# Altium PCB HanCam.PcbDoc
Units mm, origin at the board's own origin, x right, y up, seen from the top; angles counter-clockwise.
Board outline 152.4 x 101.6 mm, 2 copper layers (Top Layer, Bottom Layer); 116 components, 40 nets, 556 pads, 40 vias.
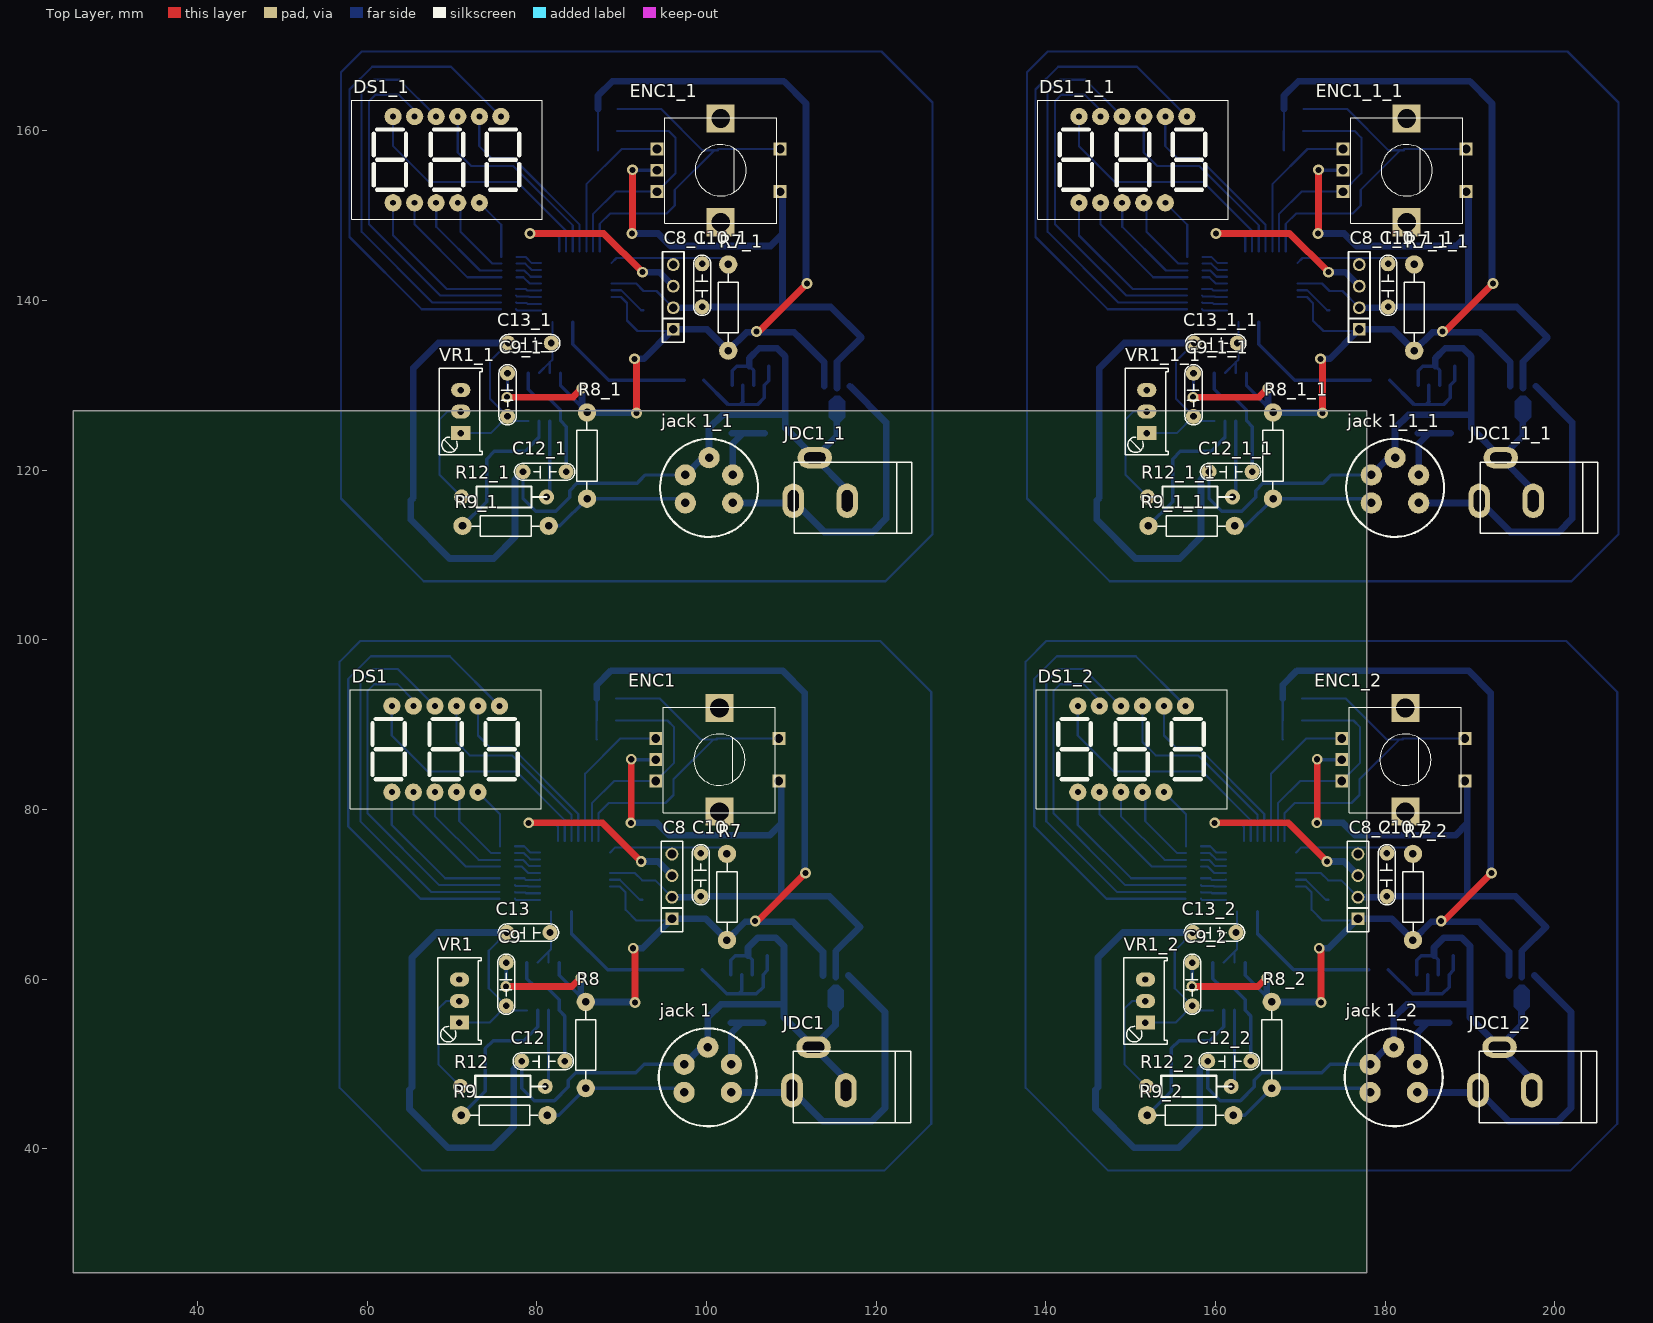
[diagram p0: Top Layer view]
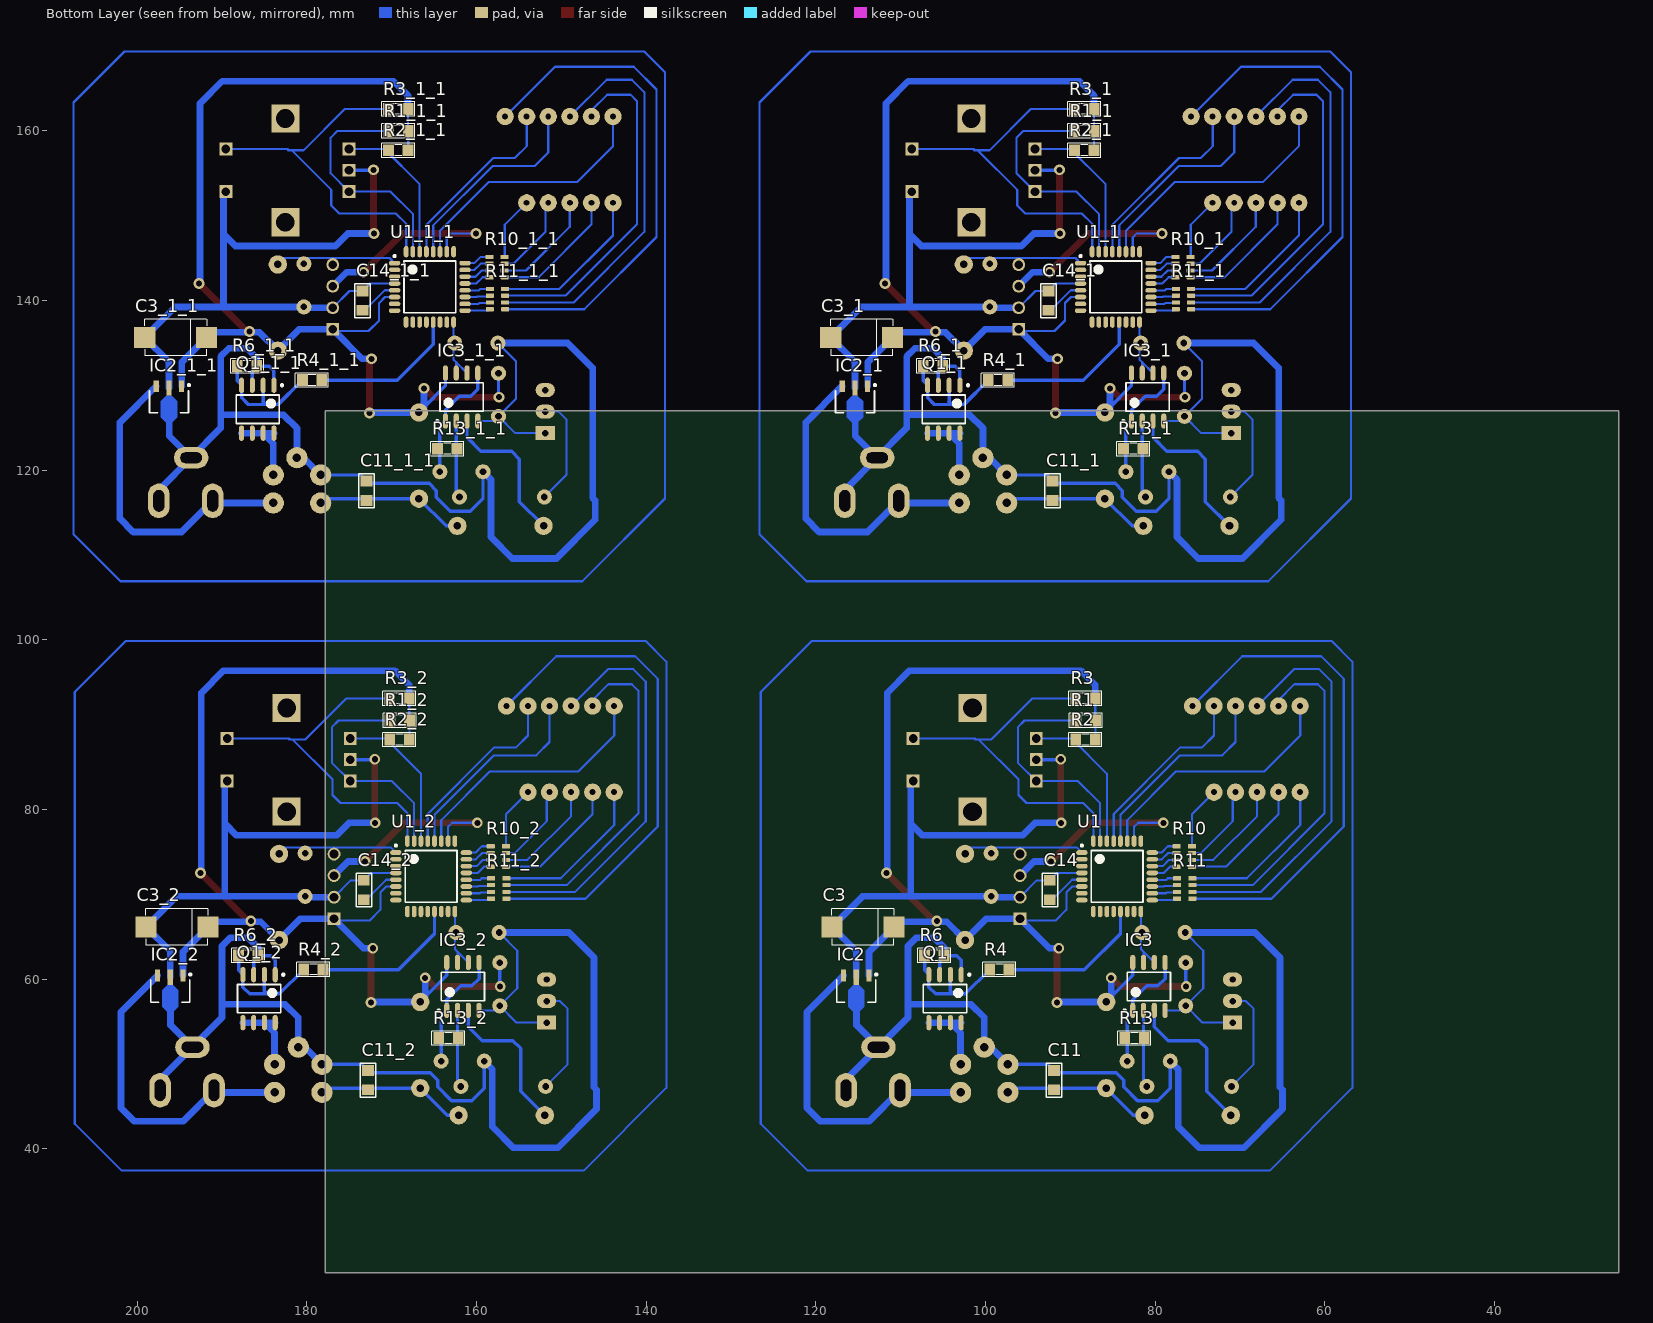
[diagram p1: Bottom Layer view, seen from below]

## Layer stack, top to bottom
Top Solder: solder mask 0.0102, Solder Resist, Dk 3.5
Top Layer: signal copper 0.0356
Dielectric 1: dielectric 0.32, FR-4, Dk 4.8
Bottom Layer: signal copper 0.0356
Bottom Solder: solder mask 0.0102, Solder Resist, Dk 3.5

## Board outline
25.4,25.4 177.8,25.4 177.8,127 25.4,127

## Design rules (kind name [scope] priority, off if disabled: settings)
Clearance [All] p1: gap=0.2 ignorepadtopadclearanceinfootprint=FALSE
PolygonConnect [All] p1: connectstyle=Relief reliefconductorwidth=0.254 reliefentries=4 polygonreliefangle="90 Angle" airgapwidth=0.254
RoutingVias [All] p1: holewidth=0.711 width=1.27 viastyle="Through Hole" minholewidth=0.711 minwidth=1.27 maxholewidth=0.711 maxwidth=1.27
SolderMaskExpansion [All] p1: expansion=0.102
Width [All] p1: maxlimit=0.8 minlimit=0.254 preferedwidth=0.4
30 further rules are at their usual default settings.

## Classes and differential pairs
component class TramHanSTM8: C3 C8 C9 C10 C11 C12 C13 C14 DS1 ENC1 IC2 IC3 "jack 1" JDC1 Q1 R1 R2 R3 R4 R6 R7 R8 R9 R10 R11 R12 R13 U1 VR1

## Components (designator, comment, footprint, x,y, rotation, side; value= is the part's Value field where it differs from the comment)
C3 "CAP" "C 2917" 114.452,66.167 r0 bottom value=*uF
C3_1 "CAP" "C 2917" 114.605,135.636 r0 bottom value=*uF (schematic designator C3)
C3_1_1 "CAP" "C 2917" 195.453,135.636 r0 bottom value=*uF (schematic designator C3)
C3_2 "CAP" "C 2917" 195.301,66.167 r0 bottom value=*uF (schematic designator C3)
C8 "JP4" JP4-C1T 95.936,67.132 r90 top
C8_1 "JP4" JP4-C1T 96.088,136.601 r90 top (schematic designator C8)
C8_1_1 "JP4" JP4-C1T 176.936,136.601 r90 top (schematic designator C8)
C8_2 "JP4" JP4-C1T 176.784,67.132 r90 top (schematic designator C8)
C9 "103" CN2 76.403,59.411 r90 top
C9_1 "103" CN2 76.556,128.88 r90 top (schematic designator C9)
C9_1_1 "103" CN2 157.404,128.88 r90 top (schematic designator C9)
C9_2 "103" CN2 157.251,59.411 r90 top (schematic designator C9)
C10 "103" CN2 99.339,72.314 r90 top
C10_1 "103" CN2 99.492,141.783 r90 top (schematic designator C10)
C10_1_1 "103" CN2 180.34,141.783 r90 top (schematic designator C10)
C10_2 "103" CN2 180.188,72.314 r90 top (schematic designator C10)
C11 "103" SM-0805 91.948,48.108 r270 bottom
C11_1 "103" SM-0805 92.1,117.577 r270 bottom (schematic designator C11)
C11_1_1 "103" SM-0805 172.949,117.577 r270 bottom (schematic designator C11)
C11_2 "103" SM-0805 172.796,48.108 r270 bottom (schematic designator C11)
C12 "103" CN2 80.772,50.343 r180 top
C12_1 "103" CN2 80.924,119.812 r180 top (schematic designator C12)
C12_1_1 "103" CN2 161.773,119.812 r180 top (schematic designator C12)
C12_2 "103" CN2 161.62,50.343 r180 top (schematic designator C12)
C13 "103" CN2 79.019,65.507 r180 top
C13_1 "103" CN2 79.172,134.976 r180 top (schematic designator C13)
C13_1_1 "103" CN2 160.02,134.976 r180 top (schematic designator C13)
C13_2 "103" CN2 159.868,65.507 r180 top (schematic designator C13)
C14 "103" SM-0805 92.431,70.51 r90 bottom
C14_1 "103" SM-0805 92.583,139.979 r90 bottom (schematic designator C14)
C14_1_1 "103" SM-0805 173.431,139.979 r90 bottom (schematic designator C14)
C14_2 "103" SM-0805 173.279,70.51 r90 bottom (schematic designator C14)
DS1 "7SEG" "LED 7 SEG 3 DIGIT" 69.266,87.122 r0 top
DS1_1 "7SEG" "LED 7 SEG 3 DIGIT" 69.418,156.591 r0 top (schematic designator DS1)
DS1_1_1 "7SEG" "LED 7 SEG 3 DIGIT" 150.266,156.591 r0 top (schematic designator DS1)
DS1_2 "7SEG" "LED 7 SEG 3 DIGIT" 150.114,87.122 r0 top (schematic designator DS1)
ENC1 "enc" ENC 101.397,96.033 r270 top
ENC1_1 "enc" ENC 101.549,165.502 r270 top (schematic designator ENC1)
ENC1_1_1 "enc" ENC 182.397,165.502 r270 top (schematic designator ENC1)
ENC1_2 "enc" ENC 182.245,96.033 r270 top (schematic designator ENC1)
IC2 "LM78xx" SOT89-321 115.24,58.623 r270 bottom
IC2_1 "LM78xx" SOT89-321 115.392,128.092 r270 bottom (schematic designator IC2)
IC2_1_1 "LM78xx" SOT89-321 196.24,128.092 r270 bottom (schematic designator IC2)
IC2_2 "LM78xx" SOT89-321 196.088,58.623 r270 bottom (schematic designator IC2)
IC3 "LM358" SO8 80.747,59.151 r90 bottom
IC3_1 "LM358" SO8 80.899,128.62 r90 bottom (schematic designator IC3)
IC3_1_1 "LM358" SO8 161.747,128.62 r90 bottom (schematic designator IC3)
IC3_2 "LM358" SO8 161.595,59.151 r90 bottom (schematic designator IC3)
"jack 1" "907" "jack 907" 103.835,49.708 r180 top
"jack 1_1" "907" "jack 907" 103.988,119.177 r180 top (schematic designator "jack 1")
"jack 1_1_1" "907" "jack 907" 184.836,119.177 r180 top (schematic designator "jack 1")
"jack 1_2" "907" "jack 907" 184.683,49.708 r180 top (schematic designator "jack 1")
JDC1 "Jac DC" DC0 113.259,49.454 r180 top
JDC1_1 "Jac DC" DC0 113.411,118.923 r180 top (schematic designator JDC1)
JDC1_1_1 "Jac DC" DC0 194.259,118.923 r180 top (schematic designator JDC1)
JDC1_2 "Jac DC" DC0 194.107,49.454 r180 top (schematic designator JDC1)
Q1 "IRF7303" SO8 104.775,57.709 r270 bottom
Q1_1 "IRF7303" SO8 104.927,127.178 r270 bottom (schematic designator Q1)
Q1_1_1 "IRF7303" SO8 185.776,127.178 r270 bottom (schematic designator Q1)
Q1_2 "IRF7303" SO8 185.623,57.709 r270 bottom (schematic designator Q1)
R1 "1k" SM-RES-0805 89.332,90.5 r180 bottom value="R1/4W - 1K"
R1_1 "1k" SM-RES-0805 89.484,159.969 r180 bottom value="R1/4W - 1K" (schematic designator R1)
R1_1_1 "1k" SM-RES-0805 170.332,159.969 r180 bottom value="R1/4W - 1K" (schematic designator R1)
R1_2 "1k" SM-RES-0805 170.18,90.5 r180 bottom value="R1/4W - 1K" (schematic designator R1)
R2 "1k" SM-RES-0805 89.357,88.24 r180 bottom value="R1/4W - 1K"
R2_1 "1k" SM-RES-0805 89.51,157.709 r180 bottom value="R1/4W - 1K" (schematic designator R2)
R2_1_1 "1k" SM-RES-0805 170.358,157.709 r180 bottom value="R1/4W - 1K" (schematic designator R2)
R2_2 "1k" SM-RES-0805 170.205,88.24 r180 bottom value="R1/4W - 1K" (schematic designator R2)
R3 "1k" SM-RES-0805 89.357,93.091 r180 bottom value="R1/4W - 1K"
R3_1 "1k" SM-RES-0805 89.51,162.56 r180 bottom value="R1/4W - 1K" (schematic designator R3)
R3_1_1 "1k" SM-RES-0805 170.358,162.56 r180 bottom value="R1/4W - 1K" (schematic designator R3)
R3_2 "1k" SM-RES-0805 170.205,93.091 r180 bottom value="R1/4W - 1K" (schematic designator R3)
R4 "1k" SM-RES-0805 99.517,61.138 r180 bottom value="R1/4W - 1K"
R4_1 "1k" SM-RES-0805 99.67,130.607 r180 bottom value="R1/4W - 1K" (schematic designator R4)
R4_1_1 "1k" SM-RES-0805 180.518,130.607 r180 bottom value="R1/4W - 1K" (schematic designator R4)
R4_2 "1k" SM-RES-0805 180.365,61.138 r180 bottom value="R1/4W - 1K" (schematic designator R4)
R6 "10k" SM-RES-0805 104.902,62.789 r0 bottom value="R1/4W - 1K"
R6_1 "10k" SM-RES-0805 105.054,132.258 r0 bottom value="R1/4W - 1K" (schematic designator R6)
R6_1_1 "10k" SM-RES-0805 185.903,132.258 r0 bottom value="R1/4W - 1K" (schematic designator R6)
R6_2 "10k" SM-RES-0805 185.75,62.789 r0 bottom value="R1/4W - 1K" (schematic designator R6)
R7 "1k" RES-1/4W 102.54,70.079 r90 top value="R1/4W - 1K"
R7_1 "1k" RES-1/4W 102.692,139.548 r90 top value="R1/4W - 1K" (schematic designator R7)
R7_1_1 "1k" RES-1/4W 183.54,139.548 r90 top value="R1/4W - 1K" (schematic designator R7)
R7_2 "1k" RES-1/4W 183.388,70.079 r90 top value="R1/4W - 1K" (schematic designator R7)
R8 "1.5k" RES-1/4W 85.649,51.867 r270 top value="R1/4W - 1K"
R8_1 "1.5k" RES-1/4W 85.801,121.336 r270 top value="R1/4W - 1K" (schematic designator R8)
R8_1_1 "1.5k" RES-1/4W 166.649,121.336 r270 top value="R1/4W - 1K" (schematic designator R8)
R8_2 "1.5k" RES-1/4W 166.497,51.867 r270 top value="R1/4W - 1K" (schematic designator R8)
R9 "10k" RES-1/4W 76.556,43.84 r0 top value="R1/4W - 1K"
R9_1 "10k" RES-1/4W 76.708,113.309 r0 top value="R1/4W - 1K" (schematic designator R9)
R9_1_1 "10k" RES-1/4W 157.556,113.309 r0 top value="R1/4W - 1K" (schematic designator R9)
R9_2 "10k" RES-1/4W 157.404,43.84 r0 top value="R1/4W - 1K" (schematic designator R9)
R10 "RP330" RESCAXS50P160X320X70-8N 76.57,74.466 r180 bottom
R10_1 "RP330" RESCAXS50P160X320X70-8N 76.722,143.935 r180 bottom (schematic designator R10)
R10_1_1 "RP330" RESCAXS50P160X320X70-8N 157.571,143.935 r180 bottom (schematic designator R10)
R10_2 "RP330" RESCAXS50P160X320X70-8N 157.418,74.466 r180 bottom (schematic designator R10)
R11 "RP330" RESCAXS50P160X320X70-8N 76.519,70.694 r180 bottom
R11_1 "RP330" RESCAXS50P160X320X70-8N 76.672,140.163 r180 bottom (schematic designator R11)
R11_1_1 "RP330" RESCAXS50P160X320X70-8N 157.52,140.163 r180 bottom (schematic designator R11)
R11_2 "RP330" RESCAXS50P160X320X70-8N 157.367,70.694 r180 bottom (schematic designator R11)
R12 "1k" "RESISTOR 1/4W" 75.997,47.371 r180 top value="R1/4W - 1K"
R12_1 "1k" "RESISTOR 1/4W" 76.149,116.84 r180 top value="R1/4W - 1K" (schematic designator R12)
R12_1_1 "1k" "RESISTOR 1/4W" 156.997,116.84 r180 top value="R1/4W - 1K" (schematic designator R12)
R12_2 "1k" "RESISTOR 1/4W" 156.845,47.371 r180 top value="R1/4W - 1K" (schematic designator R12)
R13 "10k" SM-RES-0805 83.591,53.061 r180 bottom value="R1/4W - 1K"
R13_1 "10k" SM-RES-0805 83.744,122.53 r180 bottom value="R1/4W - 1K" (schematic designator R13)
R13_1_1 "10k" SM-RES-0805 164.592,122.53 r180 bottom value="R1/4W - 1K" (schematic designator R13)
R13_2 "10k" SM-RES-0805 164.44,53.061 r180 bottom value="R1/4W - 1K" (schematic designator R13)
U1 "STM8S003K3" TQFP32 84.496,72.13 r180 bottom
U1_1 "STM8S003K3" TQFP32 84.648,141.599 r180 bottom (schematic designator U1)
U1_1_1 "STM8S003K3" TQFP32 165.497,141.599 r180 bottom (schematic designator U1)
U1_2 "STM8S003K3" TQFP32 165.344,72.13 r180 bottom (schematic designator U1)
VR1 "10K" VR1 70.891,54.889 r90 top value="VR 10K"
VR1_1 "10K" VR1 71.044,124.358 r90 top value="VR 10K" (schematic designator VR1)
VR1_1_1 "10K" VR1 151.892,124.358 r90 top value="VR 10K" (schematic designator VR1)
VR1_2 "10K" VR1 151.74,54.889 r90 top value="VR 10K" (schematic designator VR1)

## Footprints (in the part's own frame and the unit in brackets; to place one, negate y for a bottom-side part, rotate by r counter-clockwise, add the part's x,y. Pads: shape width x height; smd on the part's side, far side on the other; paste and mask are expansions set on the pad)
"C 2917" [mm] "Tantalium 100u/16V"
  rect 2.5x2.5 smd: 1(-3.65,0) 2(3.65,0)
  silkscreen extent -3.65,-2.16 3.65,2.16, body extent -3.7,-2.22 3.7,2.23, height 3.01
CN2 [mil]
  round 70 hole 31: 1(-100,0) 2(100,0)
  silkscreen extent -140,-40 140,40, body extent -154,-49 161,50, height 407
DC0 [mil] "Jac DC input"
  oval 100x160 hole 50 slot 100 at 90 deg: 1(125,100) 2(-125,100)
  oval 160x100 hole 50 slot 100 at 0 deg: 3(25,-100)
  silkscreen extent -425,-80 120,250, body extent -410,-105 134,269, height 434
ENC [mil] "encoder"
  rect 60x60 hole 40: A(301.57,-290.28) B(499,-290.28) C(400,-290.28) D(301.57,281) E(499,281)
  rect 130.51x130.5 hole 87: GND1(159.84,5)
  rect 130.5x130.5 hole 87: GND2(641,5)
  silkscreen extent 156,-255 645,265
"jack 907" [mm]
  round 2.5 hole 1: 1(0.889,3.048) 2(0.889,-0.254) 3(6.477,-0.254) 4(6.477,3.048) 5(3.683,-2.286)
  silkscreen extent -2.09,-4.5 9.45,7.04
JP4-C1T [mm] "4 row, straight, gold plating"
  rect 1.52x1.52 hole 1.02: 1(0,0)
  round 1.52 hole 1.02: 2(2.54,0) 3(5.08,0) 4(7.62,0)
  silkscreen extent -1.52,-1.27 9.14,1.27, body extent -1.52,-1.25 9.14,1.25, height 8.51
"LED 7 SEG 3 DIGIT" [mil] "LD-3361BS"
  round 80 hole 27.56: 1(-250,-200) 2(-150,-200) 3(-50,-200) 4(50,-200) 5(150,-200) 6(250,200) 7(150,200) 8(50,200) 9(-50,200) 10(-150,200) 11(-250,200)
  round 30 on Top Overlay: 12(-165,-135) 12(100,-135) 12(360,-135)
  silkscreen extent -443,-276 443,276
RES-1/4W [mil]
  round 85 hole 35: 1(-215,5) 2(185,5)
  silkscreen extent -173,-42 141,52, body extent -227,-42 197,52, height 95
RESCAXS50P160X320X70-8N [mm]
  round 0.254 on Mech15: 0(0,0)
  rrect25% 0.95x0.5 smd: 1(-0.9,1.2) 2(-0.9,0.4) 3(-0.9,-0.4) 4(-0.9,-1.2) 5(0.9,-1.2) 6(0.9,-0.4) 7(0.9,0.4) 8(0.9,1.2)
  Top Layer pour cut-out: -0.4,1.7 0.4,1.7 0.4,-1.7 -0.4,-1.7
  body extent -0.87,-1.68 0.88,1.67, height 0.7
"RESISTOR 1/4W" [mm] "R 1/4W, 2 Pin, Pitch 10mm"
  round 1.778 hole 0.8: 1(-5,0) 2(5,0)
  silkscreen extent -5,-1.25 5,1.25, body extent -5.41,-1.3 5.41,1.3, height 2.02
SM-0805 [mil] "Compoment SMD 80x50mil"
  rect 50x55 smd: 1(-45,0) 2(45,0)
  silkscreen extent -78,-36 78,36, body extent -40,-25 40,25, height 24
SM-RES-0805 [mil]
  rect 50x55 smd: 1(0,0) 2(90,0)
  silkscreen extent -32,-34 121,33, body extent 6,-25 84,25, height 31
SO8 [mm] "SOIC, 8-Leads, Body 4.9x3.9mm, Pitch 1.27mm, IPC High Density"
  oval 1.8x0.6 smd: 1(-2.825,1.905) 2(-2.825,0.635) 3(-2.825,-0.635) 4(-2.825,-1.905) 5(2.825,-1.905) 6(2.825,-0.635) 7(2.825,0.635) 8(2.825,1.905)
  silkscreen extent -2.95,-2.55 1.68,2.98, body extent -2.99,-2.45 3,2.45, height 1.6
SOT89-321 [mm] "SOT89, 3-Leads, Body 4.55x2.55mm, Pitch 1.50mm, Lead Span 4.1mm, IPC Medium Density"
  rect 1.4x0.6 smd: 1(-1.8,-1.5) 3(-1.8,1.5)
  rect 1.8x0.6 smd: 2(-1.6,0)
  Top Layer region: -0.7,0.3 -0.05,0.95 1.85,0.95 2.5,0.3 2.5,-0.3 1.85,-0.95 -0.05,-0.95 -0.7,-0.3
  silkscreen extent -2.05,-2.3 1.32,2.47, body extent -2.08,-2.25 1.92,2.25, height 1.5
TQFP32 [mm] "Thin QFP, 32-Leads, Body 9x9mm, Pitch 0.8mm, IPC Low Density"
  oval 1.35x0.55 smd: 1(-4.15,2.8) 2(-4.15,2) 3(-4.15,1.2) 4(-4.15,0.4) 5(-4.15,-0.4) 6(-4.15,-1.2) 7(-4.15,-2) 8(-4.15,-2.8) 17(4.15,-2.8) 18(4.15,-2) 19(4.15,-1.2) 20(4.15,-0.4) 21(4.15,0.4) 22(4.15,1.2) 23(4.15,2) 24(4.15,2.8)
  oval 0.55x1.35 smd: 9(-2.8,-4.15) 10(-2,-4.15) 11(-1.2,-4.15) 12(-0.4,-4.15) 13(0.4,-4.15) 14(1.2,-4.15) 15(2,-4.15) 16(2.8,-4.15) 25(2.8,4.15) 26(2,4.15) 27(1.2,4.15) 28(0.4,4.15) 29(-0.4,4.15) 30(-1.2,4.15) 31(-2,4.15) 32(-2.8,4.15)
  silkscreen extent -4.28,-3.05 3.05,3.75, body extent -4.5,-4.5 4.5,4.5, height 1.4
VR1 [mil] "Variable Resistor"
  rect 65x90 hole 30: 1(0,0)
  oval 65x90 hole 30: 2(100,0) 3(200,0)
  silkscreen extent -100,-100 301,100, body extent -87,-130 288,110, height 455

## Part data
C8 C8_1 C8_1_1 C8_2: "WR-PHD 2.54 mm Angled Socket Header", Manufacturer="Würth Elektronik eiSos GmbH", partNo=613004143121, ComponentLink1 Description=Manufacturer, ComponentLink1URL=http://www.we-online.com, ComponentLink2 Description=Datasheet, ComponentLink2URL=http://katalog.we-online.de/em/datasheet/6130xx143121.pdf, Created by="Karrer Zheng", Created Date="29 March 2013", NoPins=04
C9 C9_1 C9_1_1 C9_2 C10 C10_1 C10_1_1 C10_2 C11 C11_1 C11_1_1 C11_2 C12 C12_1 C12_1_1 C12_2 C13 C13_1 C13_1_1 C13_2 C14 C14_1 C14_1_1 C14_2: library part CM, "Cap SMD"
DS1 DS1_1 DS1_1_1 DS1_2: library part "LED 7 SEG 3 DIGIT"
ENC1 ENC1_1 ENC1_1_1 ENC1_2: library part ENC
IC2 IC2_1 IC2_1_1 IC2_2: "Positive Voltage Regulator", ComponentLink1Description="Manufacturer Link", ComponentLink1URL=http://www.st.com/, ComponentLink2Description=Datasheet, ComponentLink2URL=http://www.st.com/stonline/products/literature/ds/2146/l78m05c.pdf, DatasheetVersion=Apr-1994, LatestRevisionDate=17-Jul-2002, LatestRevisionNote="Re-released for DXP Platform.", Note="Tab is connected to pin 3 (GND).", PackageDescription="TO, Thru-Hole, Vertical, Heatsink Mounted; 3 In-Line Leads; Pitch 2.54 mm; Pin sequence 1, 3, 2", PackageReference=ISOWATT220AB, PackageVersion=Jul-1998, Published=24-Aug-2001, Publisher="Altium Limited"
IC3 IC3_1 IC3_1_1 IC3_2: "Low-Power Dual Operational Amplifier"
"jack 1" "jack 1_1" "jack 1_1_1" "jack 1_2": library part "jack 907"
JDC1 JDC1_1 JDC1_1_1 JDC1_2: library part DCIN, "Jac DC input"
Q1 Q1_1 Q1_1_1 Q1_2: "HEXFET Power MOSFET", Code_IPC=SOIC127P600-8, Code_JEDEC=MS-012-AA, ComponentLink1Description="Manufacturer Link", ComponentLink1URL=http://www.irf.com/, ComponentLink2Description=Datasheet, ComponentLink2URL=http://www.irf.com/product-info/datasheets/data/irf7303.pdf, DatasheetVersion=Aug-1997, LatestRevisionDate=13-Apr-2006, LatestRevisionNote="IPC-7351 Footprint Added.", PackageDescription="8-Pin Plastic Small Outline Integrated Circuit 1.27 mm Pitch", PackageReference=SO-8, PackageVersion=Feb-2001, Published=8-Jun-2000, Publisher="Altium Limited"
R1 R1_1 R1_1_1 R1_2 R2 R2_1 R2_1_1 R2_2 R3 R3_1 R3_1_1 R3_2 R4 R4_1 R4_1_1 R4_2 R6 R6_1 R6_1_1 R6_2 R7 R7_1 R7_1_1 R7_2 R8 R8_1 R8_1_1 R8_2 R9 R9_1 R9_1_1 R9_2 R12 R12_1 R12_1_1 R12_2 R13 R13_1 R13_1_1 R13_2: library part R1/4W, "Resistor 1/4W"
R10 R10_1 R10_1_1 R10_2 R11 R11_1 R11_1_1 R11_2: library part ResPack
U1 U1_1 U1_1_1 U1_2: "MCU 8BIT  8KB FLASH LQFP-32"
VR1 VR1_1 VR1_1_1 VR1_2: library part VR1, "Var Resistor"

## Via types
v1: diameter 1.27, hole 0.711, Top Layer to Bottom Layer, 40 vias

## Nets (pads, with @x,y where several pads share a name; then routed paths per layer and width w, separated by ;. In a path a pad name is that pad's centre, name@x,y a point inside that pad or via, vN(x,y) a via of type N, cw(c..) or ccw(c..) an arc to the next point about the centre after c; other vN are vias at no path point)
24V: "jack 1.1" IC2.1 JDC1.1 | length 37.7
  Bottom Layer w0.8: 102.946,46.66 109.83,46.66 JDC1.1 113.741,43.256 119.456,43.256 121.031,44.831 121.031,56.132 IC2.1
"907 sensor": "jack 1.4" C11.2 R8.2 R9.2 | length 17.6
  Bottom Layer w0.4: R9.2 82.575,43.967 R8.2 96.85,47.168 97.358,46.66
GND: "jack 1.3" "jack 1.5" C3.2 C8.2 C9.1 C10.1 C11.1 C12.2 C13.2 C14.2 ENC1.C ENC1.E IC2.2 IC3.4 JDC1.2 JDC1.3 Q1.1 Q1.3 R6.1 U1.4 VR1.1 | length 236.7
  Top Layer w0.8: v1(91.084,78.435) 91.135,78.486 v1(91.135,85.928)
  Bottom Layer w0.254: VR1.1 74.422,54.889 C9.1 ; C13.2 74.346,63.373 74.346,58.928 C9.1 ; IC3.4 76.948,56.326 C9.1 ; U1.4 91.554,72.53 C14.2 93.955,71.653 C8.2
  Bottom Layer w0.4: C12.2 78.232,47.168 79.705,45.695 82.093,45.695 83.718,47.32 83.718,48.108 84.582,48.971 91.669,48.971 C11.1 92.659,49.962 97.358,49.962 ; v1(91.135,85.928) 91.19,85.873 ENC1.C ; Q1.1 102.87,62.255 103.403,62.789 R6.1 105.41,62.281 Q1.3
  Bottom Layer w0.8: C13.2 68.25,65.507 65.303,62.56 65.303,47.269 64.999,46.965 64.999,44.704 69.571,40.132 74.778,40.132 77.292,42.647 77.292,49.403 C12.2 ; v1(91.084,78.435) 94.158,78.435 95.631,76.962 107.417,76.962 108.814,78.359 ; C8.2 99.238,69.672 C10.1 108.941,69.774 ; 97.358,49.962 99.39,51.994 100.152,51.994 100.152,55.474 101.727,57.048 109.144,57.048 ; R6.1 104.902,63.729 106.07,64.897 108.153,64.897 109.144,63.906 109.144,57.048 ; ENC1.E 108.814,83.079 108.814,78.359 ; 115.214,57.709 115.214,54.585 JDC1.3 ; IC2.2 115.24,63.304 C3.2 114.496,69.774 108.941,69.774 ; JDC1.2 116.434,48.184 JDC1.3 ; 108.814,78.359 108.814,69.901 108.941,69.774 ; 109.144,57.048 109.144,55.474 JDC1.3
LEFT: ENC1.A R2.1 U1.30 | length 18
  Bottom Layer w0.254: U1.30 85.696,84.223 89.847,88.373 ENC1.A
NetC7_2: 
NetC12_1: C12.1 IC3.1 IC3.5 R13.1 | length 14.3
  Bottom Layer w0.4: IC3.5 78.842,60.071 79.68,59.233 81.001,59.233 82.652,57.582 IC3.1 83.312,55.666 C12.1
NetC14_1: C14.1 U1.5 | length 4.8
  Bottom Layer w0.254: U1.5 89.789,71.73 92.151,69.367 C14.1
NetDS1_1: DS1.1 R11.8 | length 19.2
  Bottom Layer w0.254: DS1.1 62.916,78.181 69.203,71.894 R11.8
NetDS1_2: DS1.2 R10.5 | length 15.4
  Bottom Layer w0.254: DS1.2 65.456,79.477 71.666,73.266 R10.5
NetDS1_3: DS1.3 R10.6 | length 12.6
  Bottom Layer w0.254: DS1.3 67.996,79.223 73.152,74.066 R10.6
NetDS1_4: DS1.4 R10.7 | length 9.9
  Bottom Layer w0.254: DS1.4 70.866,81.712 70.866,78.638 74.638,74.866 R10.7
NetDS1_5: DS1.5 R10.8 | length 7.5
  Bottom Layer w0.254: DS1.5 75.67,79.448 R10.8
NetDS1_6: DS1.6 R11.5 | length 60.1
  Bottom Layer w0.254: DS1.6 69.748,98.069 60.452,98.069 57.785,95.402 57.785,78.003 66.294,69.494 R11.5
NetDS1_7: DS1.7 U1.29 | length 22.3
  Bottom Layer w0.254: DS1.7 73.076,88.722 74.473,87.325 77.038,87.325 84.896,79.467 U1.29
NetDS1_8: DS1.8 U1.28 | length 24.5
  Bottom Layer w0.254: DS1.8 70.536,87.96 72.111,86.385 77.089,86.385 84.096,79.378 U1.28
NetDS1_9: DS1.9 R11.6 | length 47.5
  Bottom Layer w0.254: DS1.9 63.652,96.545 60.681,96.545 59.207,95.072 59.207,78.613 67.526,70.294 R11.6
NetDS1_10: DS1.10 R11.7 | length 40.7
  Bottom Layer w0.254: DS1.10 65.456,92.913 63.602,94.767 60.833,94.767 60.071,94.005 60.071,79.527 68.504,71.094 R11.7
NetDS1_11: DS1.11 U1.27 | length 30.5
  Bottom Layer w0.254: DS1.11 62.916,88.722 67.158,84.48 77.572,84.48 83.296,78.756 U1.27
NetIC3_2: IC3.2 R12.1 R13.2 | length 9.1
  Bottom Layer w0.4: R12.1 81.382,47.756 IC3.2
NetIC3_3: IC3.3 R9.1 | length 18.2
  Bottom Layer w0.4: R9.1 73.939,46.812 73.939,51.841 74.854,52.756 78.486,52.756 80.112,54.381 IC3.3
"Netjack 1_2": "jack 1.2" Q1.5 Q1.6 Q1.7 Q1.8 | length 9.2
  Bottom Layer w0.8: Q1.8 Q1.7 ; 102.946,49.962 102.946,53.69 Q1.7 ; Q1.5 Q1.6 Q1.7
NetQ1_2: Q1.2 Q1.4 R4.1 R6.2 | length 15
  Bottom Layer w0.4: R4.1 102.387,58.268 103.81,58.268 ; Q1.2 104.14,58.649 104.165,58.623 103.81,58.268 ; R6.2 107.188,61.042 Q1.4 106.68,59.055 105.893,58.268 103.81,58.268
NetQ2_1: 
NetR10_1: R10.1 U1.24 | length 3.2
  Bottom Layer w0.254: R10.1 78.512,75.666 79.248,74.93 U1.24
NetR10_2: R10.2 U1.23 | length 3.2
  Bottom Layer w0.254: R10.2 78.499,74.866 79.235,74.13 U1.23
NetR10_3: R10.3 U1.22 | length 3.2
  Bottom Layer w0.254: R10.3 78.384,74.066 79.121,73.33 U1.22
NetR10_4: R10.4 U1.21 | length 3.2
  Bottom Layer w0.254: R10.4 78.27,73.266 79.006,72.53 U1.21
NetR11_1: R11.1 U1.20 | length 3
  Bottom Layer w0.254: R11.1 78.524,71.894 78.715,71.704 80.32,71.704 U1.20
NetR11_2: R11.2 U1.19 | length 3
  Bottom Layer w0.254: R11.2 77.521,70.993 78.918,70.993 78.981,70.93 U1.19
NetR11_3: R11.3 U1.18 | length 3
  Bottom Layer w0.254: R11.3 77.483,70.231 78.638,70.231 78.739,70.13 U1.18
NetR11_4: R11.4 U1.17 | length 3
  Bottom Layer w0.254: R11.4 77.584,69.33 U1.17
NetR12_2: R12.2 VR1.2 | length 13.1
  Bottom Layer w0.254: VR1.2 69.317,57.429 68.402,56.515 68.402,49.966 R12.2
OK: ENC1.D R3.1 U1.32 | length 42.7
  Bottom Layer w0.254: U1.32 87.274,76.302 87.274,79.553 88.494,80.772 95.174,80.772 96.114,81.712 96.114,83.566 100.787,88.24 ; R3.1 94.513,93.091 99.365,88.24 100.787,88.24 ; 101.219,88.24 100.787,88.24 ; 101.219,88.373 ENC1.D
PWM: R4.2 U1.13 | length 17.5
  Bottom Layer w0.4: U1.13 84.096,65.383 88.341,61.138 R4.2
RIGHT: ENC1.B R1.1 U1.31 | length 27.5
  Bottom Layer w0.254: U1.31 86.496,80.73 89.125,83.359 ENC1.B 96.19,85.525 96.19,89.713 95.402,90.5 R1.1
RST: C8.4 C10.2 R7.2 U1.1 | length 14.3
  Bottom Layer w0.254: U1.1 89.256,75.54 101.651,75.54 R7.2
SENSOR: C13.1 IC3.6 IC3.7 U1.16 | length 7.9
  Bottom Layer w0.254: IC3.6 81.382,63.246 ; IC3.7 81.382,63.246 ; U1.16 81.696,63.56 81.382,63.246
SPK: U1.25
SWIM: C8.3 U1.26 | length 24.8
  Top Layer w0.8: v1(79.045,78.435) 87.732,78.435 v1(92.304,73.863)
  Bottom Layer w0.254: v1(79.045,78.435) 82.017,78.435 82.496,77.956 U1.26
  Bottom Layer w0.8: v1(92.304,73.863) 94.285,73.863 C8.3
VCC: C3.1 C8.1 C9.2 IC2.3 IC3.8 R1.2 R2.2 R3.2 R7.1 R8.1 U1.6 | length 135
  Top Layer w0.8: v1(76.352,59.131) 84.125,59.131 85.192,60.198 v1(85.192,60.173) ; v1(91.364,63.652) 91.592,63.424 v1(91.592,57.252) ; v1(105.74,66.878) 106.045,66.878 v1(111.684,72.517)
  Bottom Layer w0.254: R2.2 87.046,88.265 R1.2 87.071,90.526 R3.2 ; U1.6 89.776,70.93 90.475,70.231 90.475,68.174 91.719,66.929 C8.1@95.733,66.929
  Bottom Layer w0.4: v1(76.352,59.131) 76.403,59.182 C9.2 ; IC3.8 82.652,60.452 R8.1@85.192,57.912
  Bottom Layer w0.8: v1(85.192,60.173) 85.192,57.912 R8.1 91.516,57.328 v1(91.592,57.252) ; R3.2 87.071,94.666 88.773,96.368 108.966,96.368 111.582,93.751 111.582,72.619 v1(111.684,72.517) ; v1(91.364,63.652) 92.456,63.652 95.733,66.929 C8.1 99.898,67.132 R7.1 104.572,66.777 110.193,66.777 C3.1 113.74,63.23 IC2.3
pads on no net: "jack 1_1.1" "jack 1_1.2" "jack 1_1.3" "jack 1_1.4" "jack 1_1.5" "jack 1_1_1.1" "jack 1_1_1.2" "jack 1_1_1.3" "jack 1_1_1.4" "jack 1_1_1.5" "jack 1_2.1" "jack 1_2.2" "jack 1_2.3" "jack 1_2.4" "jack 1_2.5" C3_1.1 C3_1.2 C3_1_1.1 C3_1_1.2 C3_2.1 C3_2.2 C8_1.1 C8_1.2 C8_1.3 C8_1.4 C8_1_1.1 C8_1_1.2 C8_1_1.3 C8_1_1.4 C8_2.1 C8_2.2 C8_2.3 C8_2.4 C9_1.1 C9_1.2 C9_1_1.1 C9_1_1.2 C9_2.1 C9_2.2 C10_1.1 C10_1.2 C10_1_1.1 C10_1_1.2 C10_2.1 C10_2.2 C11_1.1 C11_1.2 C11_1_1.1 C11_1_1.2 C11_2.1 C11_2.2 C12_1.1 C12_1.2 C12_1_1.1 C12_1_1.2 C12_2.1 C12_2.2 C13_1.1 C13_1.2 C13_1_1.1 C13_1_1.2 C13_2.1 C13_2.2 C14_1.1 C14_1.2 C14_1_1.1 C14_1_1.2 C14_2.1 C14_2.2 DS1.12 DS1_1.1 DS1_1.2 DS1_1.3 DS1_1.4 DS1_1.5 DS1_1.6 DS1_1.7 DS1_1.8 DS1_1.9 DS1_1.10 DS1_1.11 DS1_1.12 DS1_1_1.1 DS1_1_1.2 DS1_1_1.3 DS1_1_1.4 DS1_1_1.5 DS1_1_1.6 DS1_1_1.7 DS1_1_1.8 DS1_1_1.9 DS1_1_1.10 DS1_1_1.11 DS1_1_1.12 DS1_2.1 DS1_2.2 DS1_2.3 DS1_2.4 DS1_2.5 DS1_2.6 DS1_2.7 DS1_2.8 DS1_2.9 DS1_2.10 DS1_2.11 DS1_2.12 ENC1.GND1 ENC1.GND2 ENC1_1.A ENC1_1.B ENC1_1.C ENC1_1.D ENC1_1.E ENC1_1.GND1 ENC1_1.GND2 ENC1_1_1.A ENC1_1_1.B ENC1_1_1.C ENC1_1_1.D ENC1_1_1.E ENC1_1_1.GND1 ENC1_1_1.GND2 ENC1_2.A ENC1_2.B ENC1_2.C ENC1_2.D ENC1_2.E ENC1_2.GND1 ENC1_2.GND2 IC2_1.1 IC2_1.2 IC2_1.3 IC2_1_1.1 IC2_1_1.2 IC2_1_1.3 IC2_2.1 IC2_2.2 IC2_2.3 IC3_1.1 IC3_1.2 IC3_1.3 IC3_1.4 IC3_1.5 IC3_1.6 IC3_1.7 IC3_1.8 IC3_1_1.1 IC3_1_1.2 IC3_1_1.3 IC3_1_1.4 IC3_1_1.5 IC3_1_1.6 IC3_1_1.7 IC3_1_1.8 IC3_2.1 IC3_2.2 IC3_2.3 IC3_2.4 IC3_2.5 IC3_2.6 IC3_2.7 IC3_2.8 JDC1_1.1 JDC1_1.2 JDC1_1.3 JDC1_1_1.1 JDC1_1_1.2 JDC1_1_1.3 JDC1_2.1 JDC1_2.2 JDC1_2.3 Q1_1.1 Q1_1.2 Q1_1.3 Q1_1.4 Q1_1.5 Q1_1.6 Q1_1.7 Q1_1.8 Q1_1_1.1 Q1_1_1.2 Q1_1_1.3 Q1_1_1.4 Q1_1_1.5 Q1_1_1.6 Q1_1_1.7 Q1_1_1.8 Q1_2.1 Q1_2.2 Q1_2.3 Q1_2.4 Q1_2.5 Q1_2.6 Q1_2.7 Q1_2.8 R1_1.1 R1_1.2 R1_1_1.1 R1_1_1.2 R1_2.1 R1_2.2 R2_1.1 R2_1.2 R2_1_1.1 R2_1_1.2 R2_2.1 R2_2.2 R3_1.1 R3_1.2 R3_1_1.1 R3_1_1.2 R3_2.1 R3_2.2 R4_1.1 R4_1.2 R4_1_1.1 R4_1_1.2 R4_2.1 R4_2.2 R6_1.1 R6_1.2 R6_1_1.1 R6_1_1.2 R6_2.1 R6_2.2 R7_1.1 R7_1.2 R7_1_1.1 R7_1_1.2 R7_2.1 R7_2.2 R8_1.1 R8_1.2 R8_1_1.1 R8_1_1.2 R8_2.1 R8_2.2 R9_1.1 R9_1.2 R9_1_1.1 R9_1_1.2 R9_2.1 R9_2.2 R10.0 R10_1.0 R10_1.1 R10_1.2 R10_1.3 R10_1.4 R10_1.5 R10_1.6 R10_1.7 R10_1.8 R10_1_1.0 R10_1_1.1 R10_1_1.2 R10_1_1.3 R10_1_1.4 R10_1_1.5 R10_1_1.6 R10_1_1.7 R10_1_1.8 R10_2.0 R10_2.1 R10_2.2 R10_2.3 R10_2.4 R10_2.5 R10_2.6 R10_2.7 R10_2.8 R11.0 R11_1.0 R11_1.1 R11_1.2 R11_1.3 R11_1.4 R11_1.5 R11_1.6 R11_1.7 R11_1.8 R11_1_1.0 R11_1_1.1 R11_1_1.2 R11_1_1.3 R11_1_1.4 R11_1_1.5 R11_1_1.6 R11_1_1.7 R11_1_1.8 R11_2.0 R11_2.1 R11_2.2 R11_2.3 R11_2.4 R11_2.5 R11_2.6 R11_2.7 R11_2.8 R12_1.1 R12_1.2 R12_1_1.1 R12_1_1.2 R12_2.1 R12_2.2 R13_1.1 R13_1.2 R13_1_1.1 R13_1_1.2 R13_2.1 R13_2.2 U1.2 U1.3 U1.7 U1.8 U1.9 U1.10 U1.11 U1.12 U1.14 U1.15 U1_1.1 U1_1.2 U1_1.3 U1_1.4 U1_1.5 U1_1.6 U1_1.7 U1_1.8 U1_1.9 U1_1.10 U1_1.11 U1_1.12 U1_1.13 U1_1.14 U1_1.15 U1_1.16 U1_1.17 U1_1.18 U1_1.19 U1_1.20 U1_1.21 U1_1.22 U1_1.23 U1_1.24 U1_1.25 U1_1.26 U1_1.27 U1_1.28 U1_1.29 U1_1.30 U1_1.31 U1_1.32 U1_1_1.1 U1_1_1.2 U1_1_1.3 U1_1_1.4 U1_1_1.5 U1_1_1.6 U1_1_1.7 U1_1_1.8 U1_1_1.9 U1_1_1.10 U1_1_1.11 U1_1_1.12 U1_1_1.13 U1_1_1.14 U1_1_1.15 U1_1_1.16 U1_1_1.17 U1_1_1.18 U1_1_1.19 U1_1_1.20 U1_1_1.21 U1_1_1.22 U1_1_1.23 U1_1_1.24 U1_1_1.25 U1_1_1.26 U1_1_1.27 U1_1_1.28 U1_1_1.29 U1_1_1.30 U1_1_1.31 U1_1_1.32 U1_2.1 U1_2.2 U1_2.3 U1_2.4 U1_2.5 U1_2.6 U1_2.7 U1_2.8 U1_2.9 U1_2.10 U1_2.11 U1_2.12 U1_2.13 U1_2.14 U1_2.15 U1_2.16 U1_2.17 U1_2.18 U1_2.19 U1_2.20 U1_2.21 U1_2.22 U1_2.23 U1_2.24 U1_2.25 U1_2.26 U1_2.27 U1_2.28 U1_2.29 U1_2.30 U1_2.31 U1_2.32 VR1.3 VR1_1.1 VR1_1.2 VR1_1.3 VR1_1_1.1 VR1_1_1.2 VR1_1_1.3 VR1_2.1 VR1_2.2 VR1_2.3
copper on no net: | length 3936.4
  Top Layer w0.8: v1(76.505,128.6) 84.277,128.6 85.344,129.667 v1(85.344,129.642) ; v1(79.197,147.904) 87.884,147.904 v1(92.456,143.332) ; v1(91.237,147.904) 91.288,147.955 v1(91.288,155.397) ; v1(91.516,133.121) 91.745,132.893 v1(91.745,126.721) ; v1(105.893,136.347) 106.197,136.347 v1(111.836,141.986) ; v1(157.201,59.131) 164.973,59.131 166.04,60.198 v1(166.04,60.173) ; v1(157.353,128.6) 165.125,128.6 166.192,129.667 v1(166.192,129.642) ; v1(159.893,78.435) 168.58,78.435 v1(173.152,73.863) ; v1(160.045,147.904) 168.732,147.904 v1(173.304,143.332) ; v1(171.933,78.435) 171.983,78.486 v1(171.983,85.928) ; v1(172.085,147.904) 172.136,147.955 v1(172.136,155.397) ; v1(172.212,63.652) 172.441,63.424 v1(172.441,57.252) ; v1(172.364,133.121) 172.593,132.893 v1(172.593,126.721) ; v1(186.588,66.878) 186.893,66.878 v1(192.532,72.517) ; v1(186.741,136.347) 187.046,136.347 v1(192.684,141.986)
  Bottom Layer w0.254: 63.068,151.511 63.068,147.65 69.355,141.363 75.772,141.363 ; 63.068,161.671 63.068,158.191 67.31,153.949 77.724,153.949 83.448,148.225 83.448,145.749 ; 65.608,151.511 65.608,148.946 71.818,142.735 75.822,142.735 ; 65.608,161.671 65.608,162.382 63.754,164.236 60.985,164.236 60.223,163.474 60.223,148.996 68.656,140.563 75.772,140.563 ; 68.148,151.511 68.148,148.692 73.304,143.535 75.822,143.535 ; 68.148,161.671 63.805,166.014 60.833,166.014 59.36,164.541 59.36,148.082 67.678,139.763 75.772,139.763 ; 70.688,151.511 71.018,151.181 71.018,148.107 74.79,144.335 75.822,144.335 ; 70.688,161.671 70.688,157.429 72.263,155.854 77.241,155.854 84.248,148.847 84.248,145.749 ; 71.044,124.358 74.574,124.358 76.556,126.34 ; 71.044,126.898 69.469,126.898 68.555,125.984 68.555,119.435 71.149,116.84 ; 73.228,151.511 75.822,148.917 75.822,145.135 ; 73.228,161.671 73.228,158.191 74.625,156.794 77.191,156.794 85.048,148.936 85.048,145.749 ; 75.768,161.671 69.901,167.538 60.604,167.538 57.937,164.871 57.937,147.472 66.446,138.963 75.772,138.963 ; 76.632,134.976 74.498,132.842 74.498,128.397 76.556,126.34 ; 77.572,138.963 77.736,138.799 80.498,138.799 ; 77.572,139.763 77.635,139.7 78.791,139.7 78.892,139.599 80.498,139.599 ; 77.572,140.563 77.673,140.462 79.07,140.462 79.133,140.399 80.498,140.399 ; 77.572,141.363 78.677,141.363 78.867,141.173 80.473,141.173 80.498,141.199 ; 77.622,142.735 78.422,142.735 79.159,141.999 80.498,141.999 ; 77.622,143.535 78.537,143.535 79.273,142.799 80.498,142.799 ; 77.622,144.335 78.651,144.335 79.388,143.599 80.498,143.599 ; 77.622,145.135 78.664,145.135 79.4,144.399 80.498,144.399 ; 78.994,125.795 77.1,125.795 76.556,126.34 ; v1(79.197,147.904) 82.169,147.904 82.648,147.425 82.648,145.749 ; 80.264,131.445 81.534,132.715 ; 81.534,131.445 81.534,132.715 ; 81.848,137.449 81.848,133.029 81.534,132.715 ; 85.848,145.749 85.848,153.692 89.999,157.842 94.176,157.842 ; 86.648,145.749 86.648,150.199 89.277,152.828 94.176,152.828 96.342,154.994 96.342,159.182 95.555,159.969 89.484,159.969 ; 87.224,157.709 87.198,157.734 87.198,159.969 87.224,159.995 87.224,162.56 ; 87.448,145.749 87.427,145.771 87.427,149.022 88.646,150.241 95.326,150.241 96.266,151.181 96.266,153.035 100.94,157.709 ; 88.798,140.399 89.928,140.399 90.627,139.7 90.627,137.643 91.872,136.398 95.885,136.398 ; 88.798,141.199 89.941,141.199 92.304,138.836 92.583,138.836 ; 88.798,141.999 91.706,141.999 92.583,141.122 94.107,141.122 96.088,139.141 ; 88.798,144.399 89.408,145.009 101.803,145.009 102.565,144.247 ; 89.51,162.56 94.666,162.56 99.517,157.709 100.94,157.709 ; 101.371,157.709 100.94,157.709 ; 101.371,157.842 108.687,157.842 ; 143.764,82.042 143.764,78.181 150.051,71.894 156.467,71.894 ; 143.764,92.202 143.764,88.722 148.006,84.48 158.42,84.48 164.144,78.756 164.144,76.28 ; 143.916,151.511 143.916,147.65 150.203,141.363 156.62,141.363 ; 143.916,161.671 143.916,158.191 148.158,153.949 158.572,153.949 164.297,148.225 164.297,145.749 ; 146.304,82.042 146.304,79.477 152.514,73.266 156.518,73.266 ; 146.304,92.202 146.304,92.913 144.45,94.767 141.681,94.767 140.919,94.005 140.919,79.527 149.352,71.094 156.467,71.094 ; 146.456,151.511 146.456,148.946 152.667,142.735 156.671,142.735 ; 146.456,161.671 146.456,162.382 144.602,164.236 141.834,164.236 141.072,163.474 141.072,148.996 149.505,140.563 156.62,140.563 ; 148.844,82.042 148.844,79.223 154,74.066 156.518,74.066 ; 148.844,92.202 144.501,96.545 141.529,96.545 140.056,95.072 140.056,78.613 148.374,70.294 156.467,70.294 ; 148.996,151.511 148.996,148.692 154.153,143.535 156.671,143.535 ; 148.996,161.671 144.653,166.014 141.681,166.014 140.208,164.541 140.208,148.082 148.527,139.763 156.62,139.763 ; 151.384,82.042 151.714,81.712 151.714,78.638 155.486,74.866 156.518,74.866 ; 151.384,92.202 151.384,87.96 152.959,86.385 157.937,86.385 164.944,79.378 164.944,76.28 ; 151.536,151.511 151.867,151.181 151.867,148.107 155.639,144.335 156.671,144.335 ; 151.536,161.671 151.536,157.429 153.111,155.854 158.09,155.854 165.097,148.847 165.097,145.749 ; 151.74,54.889 155.27,54.889 157.251,56.871 ; 151.74,57.429 150.165,57.429 149.25,56.515 149.25,49.966 151.845,47.371 ; 151.892,124.358 155.423,124.358 157.404,126.34 ; 151.892,126.898 150.317,126.898 149.403,125.984 149.403,119.435 151.997,116.84 ; 153.924,82.042 156.518,79.448 156.518,75.666 ; 153.924,92.202 153.924,88.722 155.321,87.325 157.886,87.325 165.744,79.467 165.744,76.28 ; 154.076,151.511 156.671,148.917 156.671,145.135 ; 154.076,161.671 154.076,158.191 155.473,156.794 158.039,156.794 165.897,148.936 165.897,145.749 ; 156.464,92.202 150.597,98.069 141.3,98.069 138.633,95.402 138.633,78.003 147.142,69.494 156.467,69.494 ; 156.616,161.671 150.749,167.538 141.453,167.538 138.786,164.871 138.786,147.472 147.295,138.963 156.62,138.963 ; 157.328,65.507 155.194,63.373 155.194,58.928 157.251,56.871 ; 157.48,134.976 155.346,132.842 155.346,128.397 157.404,126.34 ; 158.267,69.494 158.432,69.33 161.194,69.33 ; 158.267,70.294 158.331,70.231 159.487,70.231 159.588,70.13 161.194,70.13 ; 158.267,71.094 158.369,70.993 159.766,70.993 159.829,70.93 161.194,70.93 ; 158.267,71.894 159.373,71.894 159.563,71.704 161.168,71.704 161.194,71.73 ; 158.318,73.266 159.118,73.266 159.855,72.53 161.194,72.53 ; 158.318,74.066 159.233,74.066 159.969,73.33 161.194,73.33 ; 158.318,74.866 159.347,74.866 160.083,74.13 161.194,74.13 ; 158.318,75.666 159.36,75.666 160.096,74.93 161.194,74.93 ; 158.42,138.963 158.584,138.799 161.347,138.799 ; 158.42,139.763 158.483,139.7 159.639,139.7 159.74,139.599 161.347,139.599 ; 158.42,140.563 158.521,140.462 159.918,140.462 159.981,140.399 161.347,140.399 ; 158.42,141.363 159.525,141.363 159.715,141.173 161.321,141.173 161.347,141.199 ; 158.471,142.735 159.271,142.735 160.007,141.999 161.347,141.999 ; 158.471,143.535 159.385,143.535 160.121,142.799 161.347,142.799 ; 158.471,144.335 159.499,144.335 160.236,143.599 161.347,143.599 ; 158.471,145.135 159.512,145.135 160.249,144.399 161.347,144.399 ; 159.69,56.326 157.796,56.326 157.251,56.871 ; 159.842,125.795 157.948,125.795 157.404,126.34 ; v1(159.893,78.435) 162.865,78.435 163.344,77.956 163.344,76.28 ; v1(160.045,147.904) 163.017,147.904 163.497,147.425 163.497,145.749 ; 160.96,61.976 162.23,63.246 ; 161.112,131.445 162.382,132.715 ; 162.23,61.976 162.23,63.246 ; 162.382,131.445 162.382,132.715 ; 162.544,67.98 162.544,63.56 162.23,63.246 ; 162.697,137.449 162.697,133.029 162.382,132.715 ; 166.544,76.28 166.544,84.223 170.695,88.373 174.872,88.373 ; 166.697,145.749 166.697,153.692 170.847,157.842 175.024,157.842 ; 167.344,76.28 167.344,80.73 169.973,83.359 174.872,83.359 177.038,85.525 177.038,89.713 176.251,90.5 170.18,90.5 ; 167.497,145.749 167.497,150.199 170.125,152.828 175.024,152.828 177.19,154.994 177.19,159.182 176.403,159.969 170.332,159.969 ; 167.919,88.24 167.894,88.265 167.894,90.5 167.919,90.526 167.919,93.091 ; 168.072,157.709 168.046,157.734 168.046,159.969 168.072,159.995 168.072,162.56 ; 168.144,76.28 168.123,76.302 168.123,79.553 169.342,80.772 176.022,80.772 176.962,81.712 176.962,83.566 181.635,88.24 ; 168.297,145.749 168.275,145.771 168.275,149.022 169.494,150.241 176.174,150.241 177.114,151.181 177.114,153.035 181.788,157.709 ; 169.494,70.93 170.624,70.93 171.323,70.231 171.323,68.174 172.568,66.929 176.581,66.929 ; 169.494,71.73 170.637,71.73 172.999,69.367 173.279,69.367 ; 169.494,72.53 172.402,72.53 173.279,71.653 174.803,71.653 176.784,69.672 ; 169.494,74.93 170.104,75.54 182.499,75.54 183.261,74.778 ; 169.647,140.399 170.776,140.399 171.475,139.7 171.475,137.643 172.72,136.398 176.733,136.398 ; 169.647,141.199 170.789,141.199 173.152,138.836 173.431,138.836 ; 169.647,141.999 172.555,141.999 173.431,141.122 174.955,141.122 176.936,139.141 ; 169.647,144.399 170.256,145.009 182.651,145.009 183.413,144.247 ; 170.205,93.091 175.362,93.091 180.213,88.24 181.635,88.24 ; 170.358,162.56 175.514,162.56 180.365,157.709 181.788,157.709 ; 182.067,88.24 181.635,88.24 ; 182.067,88.373 189.382,88.373 ; 182.22,157.709 181.788,157.709 ; 182.22,157.842 189.535,157.842 ; 56.769,47.193 56.769,97.434 59.207,99.873 120.472,99.873 126.492,93.853 126.492,42.977 120.955,37.44 66.523,37.44 56.769,47.193 ; 56.921,116.662 66.675,106.909 121.107,106.909 126.644,112.446 126.644,163.322 120.625,169.342 59.36,169.342 56.921,166.903 56.921,116.662 ; 137.617,47.193 147.371,37.44 201.803,37.44 207.34,42.977 207.34,93.853 201.32,99.873 140.056,99.873 137.617,97.434 137.617,47.193 ; 137.77,116.662 137.77,166.903 140.208,169.342 201.473,169.342 207.493,163.322 207.493,112.446 201.955,106.909 147.523,106.909 137.77,116.662
  Bottom Layer w0.4: 71.247,113.436 74.092,116.281 74.092,121.31 75.006,122.225 78.638,122.225 80.264,123.85 80.264,125.795 ; v1(76.505,128.6) 76.556,128.651 76.556,131.42 ; 78.384,119.812 78.384,116.637 79.858,115.164 82.245,115.164 83.871,116.789 83.871,117.577 84.734,118.44 91.821,118.44 92.1,118.72 92.812,119.431 97.511,119.431 ; 78.994,131.445 78.994,129.54 79.832,128.702 81.153,128.702 82.804,127.051 82.804,125.795 83.464,125.135 83.464,119.812 ; 81.149,116.84 81.534,117.225 81.534,125.795 ; 81.407,113.436 82.728,113.436 85.928,116.637 97.003,116.637 97.511,116.129 ; 82.804,131.445 82.804,129.921 85.344,127.381 ; 84.248,137.449 84.248,134.852 88.494,130.607 97.384,130.607 ; v1(91.288,155.397) 91.342,155.342 94.176,155.342 ; 99.67,130.607 102.54,127.737 103.962,127.737 ; 103.022,130.003 103.022,131.724 103.556,132.258 105.054,132.258 105.562,131.75 105.562,130.003 ; 104.292,130.003 104.292,128.118 104.318,128.092 103.962,127.737 ; 107.34,132.258 107.34,130.511 106.832,130.003 106.832,128.524 106.045,127.737 103.962,127.737 ; 151.943,43.967 154.788,46.812 154.788,51.841 155.702,52.756 159.334,52.756 160.96,54.381 160.96,56.326 ; 152.095,113.436 154.94,116.281 154.94,121.31 155.854,122.225 159.487,122.225 161.112,123.85 161.112,125.795 ; v1(157.201,59.131) 157.251,59.182 157.251,61.951 ; v1(157.353,128.6) 157.404,128.651 157.404,131.42 ; 159.08,50.343 159.08,47.168 160.553,45.695 162.941,45.695 164.567,47.32 164.567,48.108 165.43,48.971 172.517,48.971 172.796,49.251 173.507,49.962 178.206,49.962 ; 159.233,119.812 159.233,116.637 160.706,115.164 163.093,115.164 164.719,116.789 164.719,117.577 165.583,118.44 172.669,118.44 172.949,118.72 173.66,119.431 178.359,119.431 ; 159.69,61.976 159.69,60.071 160.528,59.233 161.849,59.233 163.5,57.582 163.5,56.326 164.16,55.666 164.16,50.343 ; 159.842,131.445 159.842,129.54 160.68,128.702 162.001,128.702 163.652,127.051 163.652,125.795 164.313,125.135 164.313,119.812 ; 161.845,47.371 162.23,47.756 162.23,56.326 ; 161.997,116.84 162.382,117.225 162.382,125.795 ; 162.103,43.967 163.424,43.967 166.624,47.168 177.698,47.168 178.206,46.66 ; 162.255,113.436 163.576,113.436 166.776,116.637 177.851,116.637 178.359,116.129 ; 163.5,61.976 163.5,60.452 166.04,57.912 ; 163.652,131.445 163.652,129.921 166.192,127.381 ; 164.944,67.98 164.944,65.383 169.189,61.138 178.079,61.138 ; 165.097,137.449 165.097,134.852 169.342,130.607 178.232,130.607 ; v1(171.983,85.928) 172.038,85.873 174.872,85.873 ; v1(172.136,155.397) 172.191,155.342 175.024,155.342 ; 180.365,61.138 183.236,58.268 184.658,58.268 ; 180.518,130.607 183.388,127.737 184.81,127.737 ; 183.718,60.534 183.718,62.255 184.252,62.789 185.75,62.789 186.258,62.281 186.258,60.534 ; 183.871,130.003 183.871,131.724 184.404,132.258 185.903,132.258 186.411,131.75 186.411,130.003 ; 184.988,60.534 184.988,58.649 185.014,58.623 184.658,58.268 ; 185.141,130.003 185.141,128.118 185.166,128.092 184.81,127.737 ; 188.036,62.789 188.036,61.042 187.528,60.534 187.528,59.055 186.741,58.268 184.658,58.268 ; 188.189,132.258 188.189,130.511 187.681,130.003 187.681,128.524 186.893,127.737 184.81,127.737
  Bottom Layer w0.8: 76.632,134.976 68.402,134.976 65.456,132.029 65.456,116.738 65.151,116.434 65.151,114.173 69.723,109.601 74.93,109.601 77.445,112.116 77.445,118.872 78.384,119.812 ; v1(85.344,129.642) 85.344,127.381 85.928,126.797 91.669,126.797 v1(91.745,126.721) ; 87.224,162.56 87.224,164.135 88.925,165.837 109.118,165.837 111.735,163.22 111.735,142.088 v1(111.836,141.986) ; v1(91.237,147.904) 94.31,147.904 95.783,146.431 107.569,146.431 108.966,147.828 ; v1(91.516,133.121) 92.608,133.121 95.885,136.398 96.088,136.601 100.051,136.601 102.565,134.087 104.724,136.246 110.345,136.246 110.955,135.636 113.892,132.699 113.892,129.892 ; v1(92.456,143.332) 94.437,143.332 96.088,141.681 ; 96.088,139.141 99.39,139.141 99.492,139.243 109.093,139.243 ; 97.511,119.431 99.543,121.463 100.305,121.463 100.305,124.943 101.879,126.517 109.296,126.517 ; 103.022,124.353 104.292,124.353 ; 103.099,116.129 109.982,116.129 110.236,116.383 113.894,112.725 119.609,112.725 121.183,114.3 121.183,125.601 116.892,129.892 ; 103.099,119.431 103.099,123.159 104.292,124.353 ; 105.054,132.258 105.054,133.198 106.223,134.366 108.306,134.366 109.296,133.375 109.296,126.517 ; 106.832,124.353 105.562,124.353 104.292,124.353 ; 108.687,152.828 108.966,152.548 108.966,147.828 ; 115.367,127.178 115.367,124.054 112.776,121.463 ; 115.392,129.692 115.392,132.773 118.255,135.636 114.648,139.243 109.093,139.243 ; 116.586,116.383 116.586,117.653 112.776,121.463 ; 157.328,65.507 149.098,65.507 146.152,62.56 146.152,47.269 145.847,46.965 145.847,44.704 150.419,40.132 155.626,40.132 158.14,42.647 158.14,49.403 159.08,50.343 ; 157.48,134.976 149.25,134.976 146.304,132.029 146.304,116.738 145.999,116.434 145.999,114.173 150.571,109.601 155.778,109.601 158.293,112.116 158.293,118.872 159.233,119.812 ; v1(166.04,60.173) 166.04,57.912 166.624,57.328 172.364,57.328 v1(172.441,57.252) ; v1(166.192,129.642) 166.192,127.381 166.776,126.797 172.517,126.797 v1(172.593,126.721) ; 167.919,93.091 167.919,94.666 169.621,96.368 189.814,96.368 192.43,93.751 192.43,72.619 v1(192.532,72.517) ; 168.072,162.56 168.072,164.135 169.774,165.837 189.967,165.837 192.583,163.22 192.583,142.088 v1(192.684,141.986) ; v1(171.933,78.435) 175.006,78.435 176.479,76.962 188.265,76.962 189.662,78.359 ; v1(172.085,147.904) 175.158,147.904 176.632,146.431 188.417,146.431 189.814,147.828 ; v1(172.212,63.652) 173.304,63.652 176.581,66.929 176.784,67.132 180.746,67.132 183.261,64.618 185.42,66.777 191.041,66.777 191.651,66.167 194.588,63.23 194.588,60.423 ; v1(172.364,133.121) 173.457,133.121 176.733,136.398 176.936,136.601 180.899,136.601 183.413,134.087 185.572,136.246 191.193,136.246 191.803,135.636 194.74,132.699 194.74,129.892 ; v1(173.152,73.863) 175.133,73.863 176.784,72.212 ; v1(173.304,143.332) 175.285,143.332 176.936,141.681 ; 176.784,69.672 180.086,69.672 180.188,69.774 189.789,69.774 ; 176.936,139.141 180.238,139.141 180.34,139.243 189.941,139.243 ; 178.206,49.962 180.238,51.994 181,51.994 181,55.474 182.575,57.048 189.992,57.048 ; 178.359,119.431 180.391,121.463 181.153,121.463 181.153,124.943 182.728,126.517 190.144,126.517 ; 183.718,54.884 184.988,54.884 ; 183.794,46.66 190.678,46.66 190.932,46.914 194.589,43.256 200.304,43.256 201.879,44.831 201.879,56.132 197.588,60.423 ; 183.794,49.962 183.794,53.69 184.988,54.884 ; 183.871,124.353 185.141,124.353 ; 183.947,116.129 190.83,116.129 191.084,116.383 194.742,112.725 200.457,112.725 202.032,114.3 202.032,125.601 197.74,129.892 ; 183.947,119.431 183.947,123.159 185.141,124.353 ; 185.75,62.789 185.75,63.729 186.919,64.897 189.001,64.897 189.992,63.906 189.992,57.048 ; 185.903,132.258 185.903,133.198 187.071,134.366 189.154,134.366 190.144,133.375 190.144,126.517 ; 187.528,54.884 186.258,54.884 184.988,54.884 ; 187.681,124.353 186.411,124.353 185.141,124.353 ; 189.382,83.359 189.662,83.079 189.662,78.359 ; 189.535,152.828 189.814,152.548 189.814,147.828 ; 196.063,57.709 196.063,54.585 193.472,51.994 ; 196.088,60.223 196.088,63.304 198.951,66.167 195.344,69.774 189.789,69.774 ; 196.215,127.178 196.215,124.054 193.624,121.463 ; 196.24,129.692 196.24,132.773 199.103,135.636 195.496,139.243 189.941,139.243 ; 197.282,46.914 197.282,48.184 193.472,51.994 ; 197.434,116.383 197.434,117.653 193.624,121.463 ; 108.966,147.828 108.966,139.37 109.093,139.243 ; 109.296,126.517 109.296,124.943 112.776,121.463 ; 189.662,78.359 189.662,69.901 189.789,69.774 ; 189.814,147.828 189.814,139.37 189.941,139.243 ; 189.992,57.048 189.992,55.474 193.472,51.994 ; 190.144,126.517 190.144,124.943 193.624,121.463

## Text inside footprints (layer, text, board x,y; h text height)
ENC1: Mechanical 3 ">NAME" at 110.033,88.373 h1.97 r270; Mechanical 5 ">VALUE" at 92.524,82.368 h1.97 r90
ENC1_1: Mechanical 3 ">NAME" at 110.185,157.842 h1.97 r270; Mechanical 5 ">VALUE" at 92.676,151.837 h1.97 r90
ENC1_1_1: Mechanical 3 ">NAME" at 191.033,157.842 h1.97 r270; Mechanical 5 ">VALUE" at 173.524,151.837 h1.97 r90
ENC1_2: Mechanical 3 ">NAME" at 190.881,88.373 h1.97 r270; Mechanical 5 ">VALUE" at 173.372,82.368 h1.97 r90